# Altium PCB PCB_wordclocksmall_2023-02-03.pcbdoc (part 4 of 4)
Units mm, origin at the board's own origin, x right, y up, seen from the top; angles counter-clockwise.
Board outline 275.21 x 268.14 mm, 2 copper layers (Top Layer, Bottom Layer); 355 components, 229 nets, 1166 pads, 399 vias.
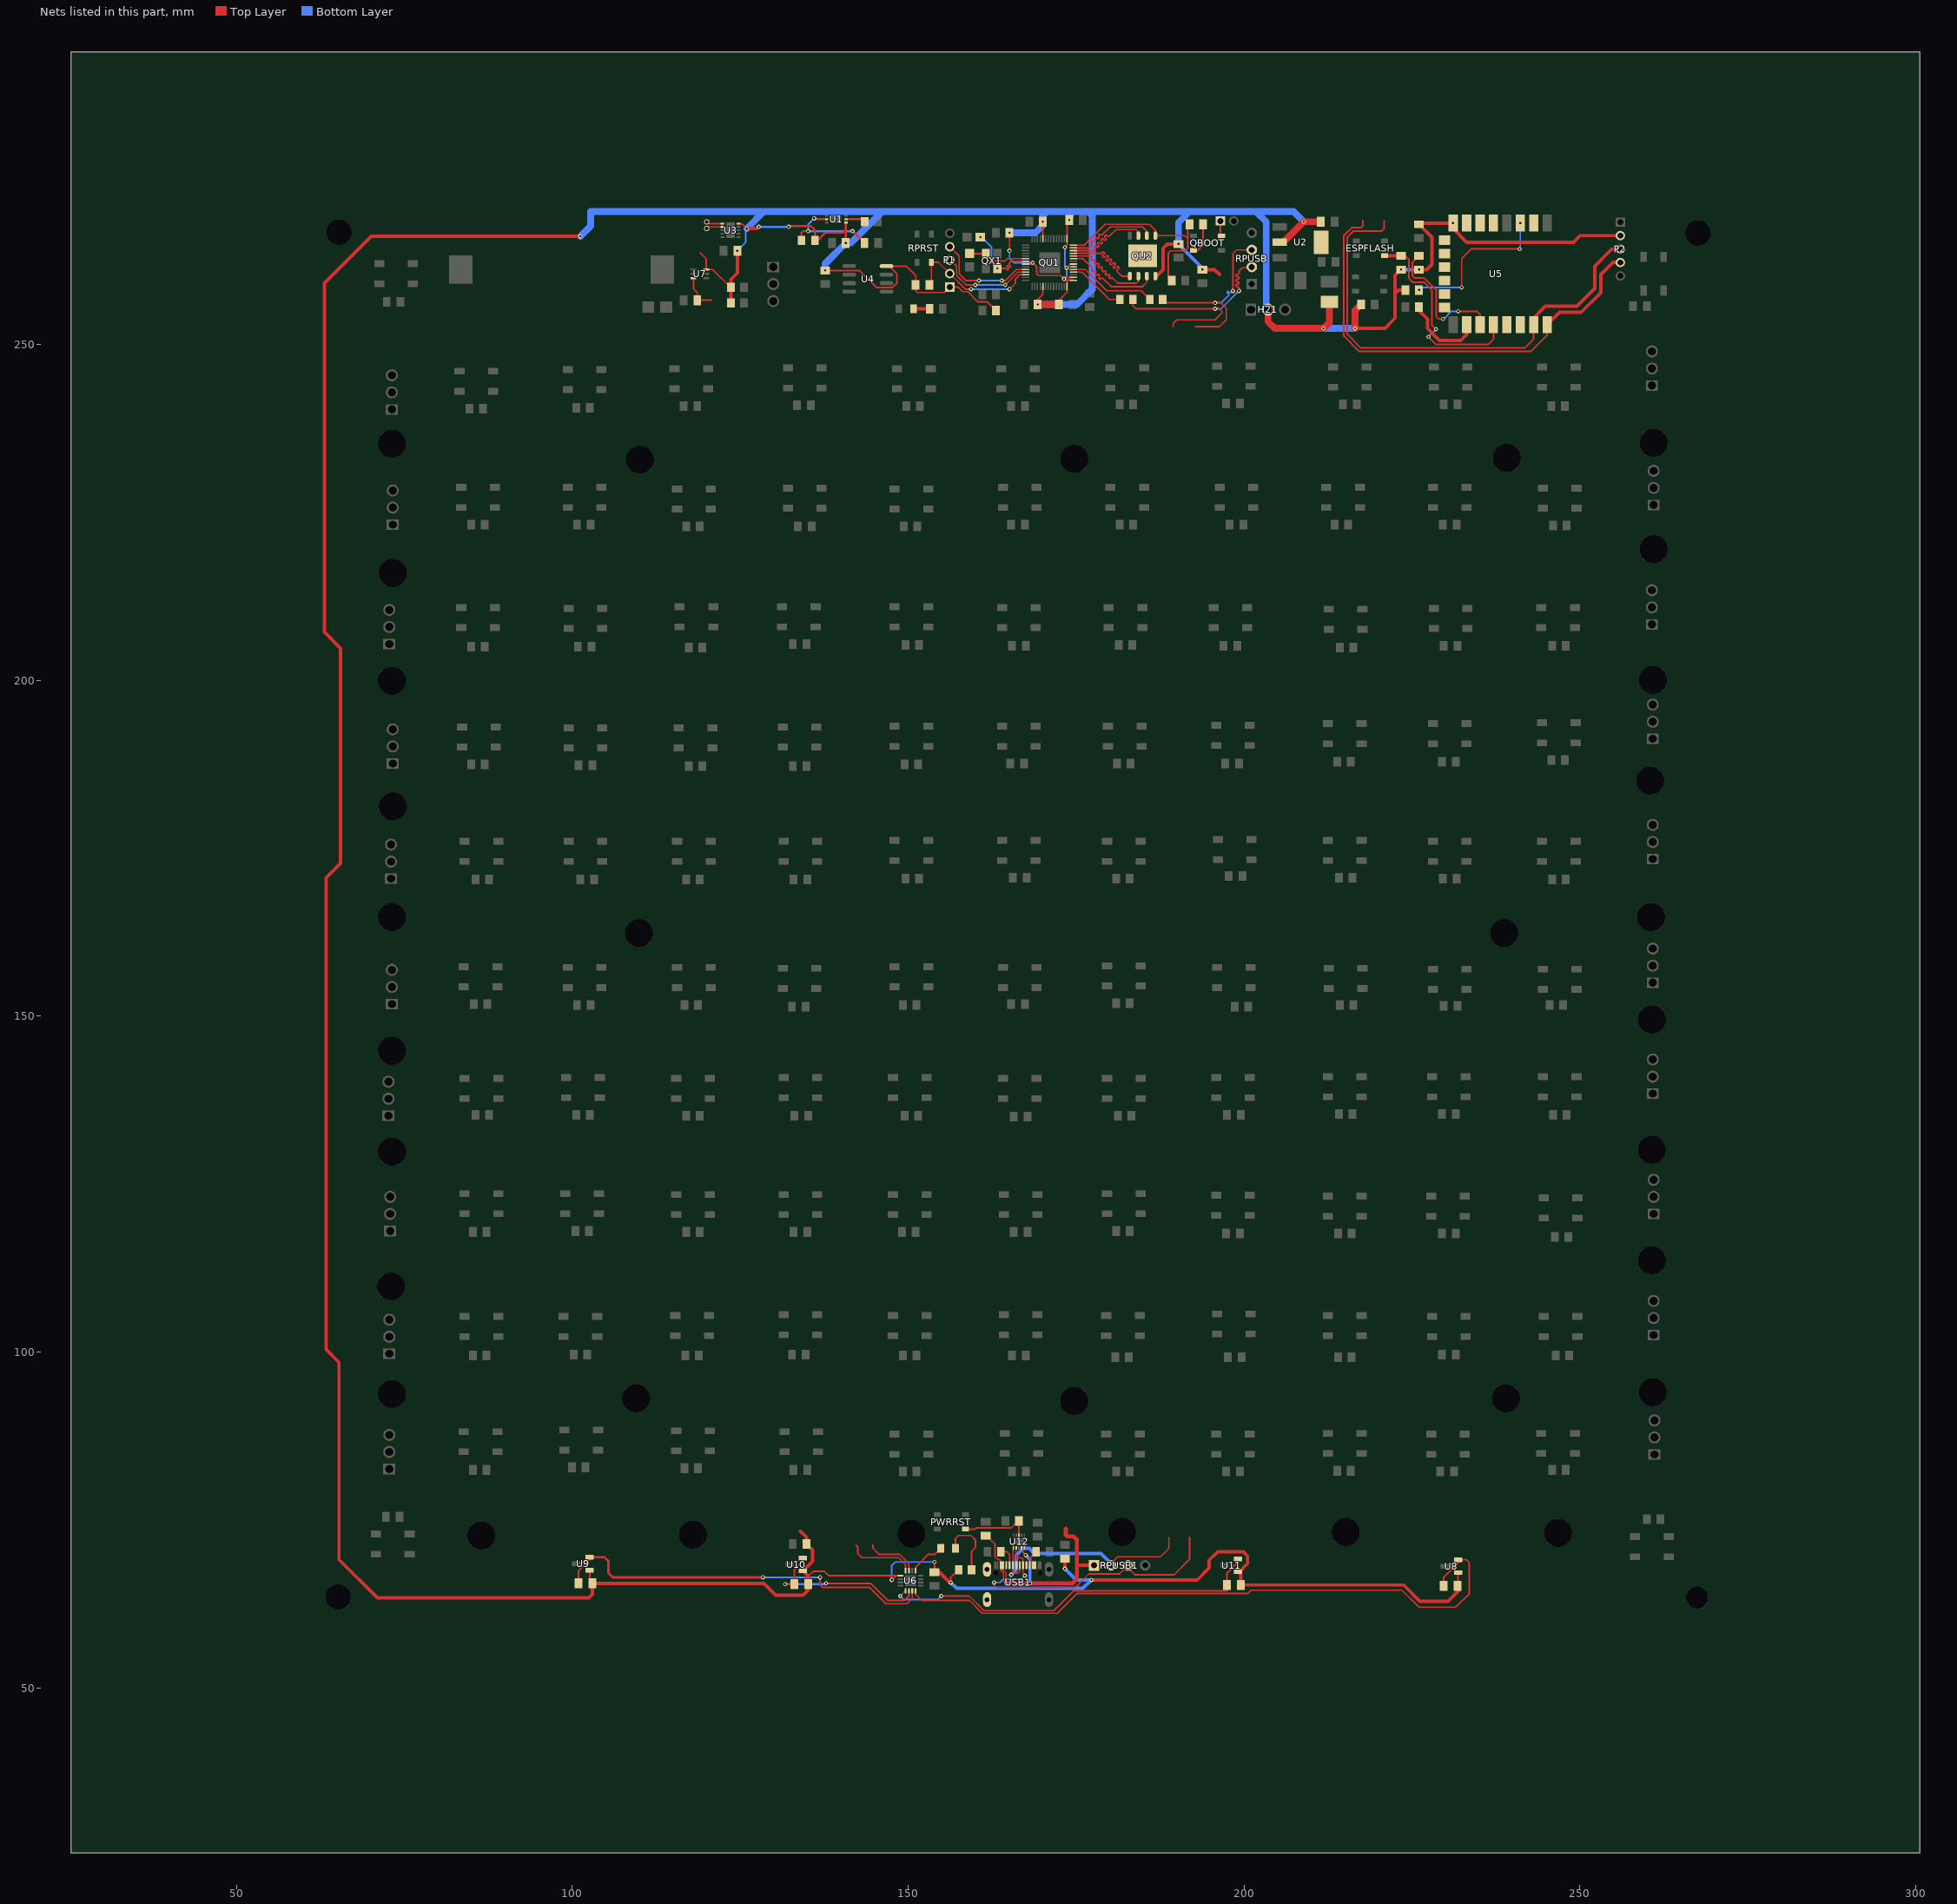
[diagram p4: the nets of this part, all layers, seen from the top]

## Via types
v1: diameter 0.635, hole 0.305, Top Layer to Bottom Layer, tented both sides, 361 vias
v2: diameter 0.61, hole 0.305, Top Layer to Bottom Layer, tented both sides, 37 vias
v3: diameter 1, hole 0.5, Top Layer to Bottom Layer, tented both sides, 1 vias

## Nets (pads, with @x,y where several pads share a name; then routed paths per layer and width w, separated by ;. In a path a pad name is that pad's centre, name@x,y a point inside that pad or via, vN(x,y) a via of type N, cw(c..) or ccw(c..) an arc to the next point about the centre after c; other vN are vias at no path point) (continued)
QBOOT_2: QBOOT.2 R11.2 | length 4.9
  Top Layer w0.254: QBOOT.2@192.464,264.019 193.109,264.02 193.929,264.84 R11.2@193.929,267.888
QBOOT_3: P3.1 QBOOT.3 | length 2.3
  Top Layer w0.229: P3.1@196.485,268.396 196.485,266.348 QBOOT.3@196.664,266.169
QSPI_CLK: QU1.52 QU2.6 | length 15
  Top Layer w0.229: QU1.52@174.62,263.174 177.18,263.174 177.312,263.042 177.312,262.861 177.223,262.772 177.223,262.592 177.312,262.503 177.493,262.503 177.582,262.592 177.762,262.592 177.851,262.503 177.851,262.323 177.762,262.234 177.762,262.054 177.851,261.965 178.031,261.965 178.12,262.054 178.3,262.054 178.389,261.965 178.389,261.784 178.3,261.695 178.3,261.515 178.389,261.426 178.57,261.426 178.659,261.515 178.839,261.515 178.928,261.426 178.928,261.246 178.839,261.157 178.839,260.977 178.928,260.888 179.108,260.888 179.197,260.977 179.377,260.977 179.466,260.888 179.466,260.707 179.377,260.616 179.377,260.438 179.466,260.347 179.647,260.347 179.738,260.438 179.916,260.438 180.007,260.347 180.007,260.169 179.916,260.077 179.916,259.9 180.007,259.808 180.185,259.808 180.276,259.9 180.454,259.9 181.229,259.125 184.023,259.125 184.277,259.379 QU2.6@184.277,260.176
QSPI_SD0: QU1.53 QU2.5 | length 14.7
  Top Layer w0.229: QU1.53@174.619,263.573 178.432,263.572 178.504,263.501 178.684,263.501 178.953,263.771 179.131,263.771 179.222,263.682 179.222,263.501 178.953,263.232 178.953,263.052 179.042,262.963 179.222,262.963 179.492,263.232 179.669,263.232 179.761,263.143 179.761,262.963 179.492,262.694 179.492,262.513 179.581,262.424 179.761,262.424 180.03,262.694 180.21,262.694 180.299,262.605 180.299,262.424 180.03,262.155 180.03,261.975 180.119,261.886 180.299,261.886 180.569,262.155 180.749,262.155 180.838,262.064 180.838,261.886 180.569,261.617 180.569,261.436 180.657,261.347 180.838,261.347 181.107,261.617 181.287,261.617 181.376,261.525 181.376,261.347 181.107,261.078 181.107,260.898 181.864,260.141 181.9,260.177 QU2.5@183.007,260.176
QSPI_SD1: QU1.55 QU2.2 | length 14.6
  Top Layer w0.229: QU1.55@174.619,264.373 176.952,264.373 177.371,264.792 177.371,264.969 177.279,265.061 177.279,265.239 177.371,265.33 177.549,265.33 177.64,265.239 177.818,265.239 177.909,265.33 177.909,265.508 177.818,265.599 177.818,265.78 177.909,265.869 178.087,265.869 178.178,265.78 178.356,265.78 178.448,265.869 178.448,266.049 178.356,266.138 178.356,266.318 178.448,266.407 178.628,266.407 178.717,266.318 178.897,266.318 180.086,267.507 184.912,267.507 185.547,266.872 QU2.2@185.547,266.202
QSPI_SD2: QU1.54 QU2.3 | length 14.5
  Top Layer w0.229: QU1.54@174.62,263.974 177.823,263.974 177.858,264.009 177.858,264.19 177.681,264.37 177.681,264.548 177.77,264.639 177.95,264.639 178.128,264.459 178.308,264.459 178.397,264.548 178.397,264.728 178.219,264.909 178.219,265.089 178.308,265.178 178.488,265.178 178.669,264.997 178.846,264.997 178.938,265.089 178.938,265.267 178.758,265.447 178.758,265.627 178.846,265.716 179.027,265.716 179.207,265.536 179.385,265.536 179.476,265.627 179.476,265.805 179.296,265.985 179.296,266.166 179.385,266.255 179.565,266.255 179.746,266.077 179.926,266.077 180.975,267.126 183.896,267.126 184.277,266.745 QU2.3@184.277,266.202
QSPI_SD3: QU1.51 QU2.7 | length 15.2
  Top Layer w0.229: QU1.51@174.619,262.773 176.058,262.772 177.424,261.406 177.424,261.226 177.335,261.137 177.335,260.956 177.424,260.867 177.604,260.867 177.693,260.956 177.874,260.956 177.963,260.867 177.963,260.687 177.874,260.598 177.874,260.418 177.963,260.329 178.143,260.329 178.232,260.418 178.412,260.418 178.501,260.329 178.501,260.149 178.412,260.06 178.412,259.879 178.501,259.79 178.681,259.79 178.77,259.879 178.951,259.879 180.213,258.617 184.912,258.617 185.547,259.252 QU2.7@185.547,260.176
QSPI_SS: QU1.56 QU2.1 R11.1 R12.2 | length 30.8
  Top Layer w0.229: QU1.56@174.62,264.774 176.21,264.774 179.324,267.888 185.928,267.888 186.817,266.999 QU2.1@186.817,266.202 ; QU2.1@186.817,266.202 191.17,266.202 191.643,265.729 ; R12.2@189.23,259.506 188.722,260.014 188.722,263.57 189.103,263.951 191.262,263.951 191.643,264.332 191.643,265.729 ; R11.1@191.897,267.888 191.643,267.634 191.643,265.729
QU1_46: QU1.46 R9.1 | length 8.6
  Top Layer w0.229: QU1.46@174.619,260.773 175.898,260.773 179.959,256.712 R9.1@181.533,256.712
QU1_47: QU1.47 R7.1 | length 13.2
  Top Layer w0.229: QU1.47@174.619,261.173 176.388,261.172 179.578,257.982 184.709,257.982 R7.1@185.978,256.712
QU2_9: QU2.9
R10_2: JP8.1 R10.2 U7.3 | length 5.7
  Top Layer w0.229: U7.3@118.054,259.872 118.054,258.292 118.618,257.728 R10.2@118.618,256.585
  Top Layer w0.254: R10.2@118.618,256.585 JP8.1@120.752,256.585
R13_2: LED116.2 R13.2 | length 2.4
  Top Layer w0.508: LED116.2@150.833,255.315 R13.2@153.212,255.315
R25_2: LED2.2 R25.2 | length 9.6
  Top Layer w0.229: LED2.2@157.056,70.784 157.056,72.265 157.48,72.689 159.385,72.689 160.02,72.054 160.02,70.911 159.462,70.353 R25.2@159.462,67.609
RUN: P1.2 QU1.26 R5.1 RPRST.2 | length 20.4
  Top Layer w0.229: R5.1@153.162,258.871 153.475,259.184 RPRST.2@153.475,262.232 154.532,262.232 P1.2@156.21,260.554 158.529,258.236 v1(159.385,258.236) ; v1(165.1,258.236) 165.989,259.125 165.989,259.76 166.602,260.373 QU1.26@167.519,260.373
  Bottom Layer w0.229: v1(159.385,258.236) v1(165.1,258.236)
S$28: 
S$38: 
S$40: 
SWCLK: P1.4 QU1.24 | length 15.6
  Top Layer w0.229: P1.4@156.21,264.554 157.607,263.156 157.607,260.522 158.623,259.506 v1(160.528,259.506) ; v1(163.957,259.506) 164.465,259.506 166.131,261.172 QU1.24@167.519,261.173
  Bottom Layer w0.229: v1(160.528,259.506) v1(163.957,259.506)
SWD: P1.3 QU1.25 | length 14.4
  Top Layer w0.229: P1.3@156.21,262.554 156.337,262.554 157.226,261.665 157.226,260.268 158.623,258.871 v1(160.02,258.871) ; v1(164.465,258.871) 166.368,260.773 QU1.25@167.519,260.773
  Bottom Layer w0.229: v1(160.02,258.871) v1(164.465,258.871)
U1_2: R1.1 U1.2 | length 3
  Top Layer w0.3: U1.2@140.747,268.65 143.179,268.65 R1.1@143.56,268.269
U1_5: C7.1 R2.1 U1.5 | length 15.6
  Top Layer w0.254: R2.1@134.128,265.475 134.128,266.634 134.366,266.872 v1(135.128,266.872)
  Top Layer w0.3: v1(136.017,268.777) 136.144,268.65 U1.5@137.891,268.65 ; v1(141.732,266.872) C7.1@143.51,265.094
  Bottom Layer w0.3: v1(136.017,268.777) 135.128,267.888 v1(135.128,266.872) v1(141.732,266.872)
U2_4: U2.4
U5_2: U5.2
U5_3: R8.1 U5.3 | length 23.9
  Top Layer w0.254: v2(232.41,258.49) 232.41,262.808 233.807,264.205 v2(241.046,264.205)
  Bottom Layer w0.254: v2(226.06,258.109) 226.441,258.49 v2(232.41,258.49) ; v2(241.046,264.205) 241.14,264.299 v2(241.14,268.073)
U5_5: U5.5
U5_6: U5.6
U5_7: U5.7
U5_10: R16.2 U5.10 | length 12.1
  Top Layer w0.508: R16.2@226.06,255.569 226.06,255.061 227.33,253.791 227.33,252.394 229.108,250.616 232.283,250.616 233.142,251.474 U5.10@233.141,252.972
U5_11: R15.2 U5.11 | length 20.6
  Top Layer w0.254: R15.2@226.06,263.189 225.044,262.173 225.044,260.268 225.425,259.887 226.822,259.887 228.6,258.109 228.6,254.172 228.981,253.791 v2(229.616,253.791) ; v2(231.902,254.934) 234.696,254.934 235.141,254.489 U5.11@235.141,252.97
  Bottom Layer w0.254: v2(229.616,253.791) 229.743,253.791 230.886,254.934 v2(231.902,254.934)
U5_12: ESPFLASH.4 R14.2 U5.12 | length 31.2
  Top Layer w0.254: R14.2@223.393,263.189 224.028,263.189 224.536,262.681 224.536,259.887 225.171,259.252 226.822,259.252 227.965,258.109 227.965,252.902 v2(228.6,252.267) ; v2(227.457,251.124) 228.6,249.981 236.347,249.981 237.14,250.774 U5.12@237.141,252.971
  Top Layer w0.508: ESPFLASH.4@220.921,263.257 220.989,263.189 R14.2@223.393,263.189
  Bottom Layer w0.254: v2(227.457,251.124) v2(228.6,252.267)
U5_13: U5.13
U5_14: U5.14
U5_15: JP11.1 P2.3 U5.15 | length 73
  Top Layer w0.254: JP11.1@220.878,268.396 220.878,267.278 220.472,266.872 216.281,266.872 215.392,265.983 215.392,251.505 217.424,249.473 241.808,249.473 243.141,250.806 U5.15@243.141,252.971
  Top Layer w0.508: U5.15@243.141,252.971 243.14,253.98 244.856,255.696 249.555,255.696 252.222,258.363 252.222,261.665 254.762,264.205 P2.3@256.032,264.205
U5_16: JP10.1 P2.4 U5.16 | length 69.2
  Top Layer w0.254: JP10.1@217.703,268.396 217.678,268.371 217.678,267.634 217.424,267.38 216.027,267.38 214.884,266.237 214.884,251.251 217.17,248.965 242.697,248.965 245.14,251.408 U5.16@245.141,252.971
  Top Layer w0.508: U5.16@245.141,252.971 246.977,254.807 250.19,254.807 253.111,257.728 253.111,260.395 254.922,262.206 P2.4@256.032,262.206
U5_17: U5.17
U5_18: U5.18
U5_19: U5.19
U5_20: U5.20
U5_21: U5.21
U5_22: U5.22
U6_13: LED2.1 U6.13 | length 5.4
  Top Layer w0.229: U6.13@151.117,67.458 151.118,67.978 153.035,69.895 153.967,69.895 LED2.1@154.856,70.784
U6_15: JP9.1 U6.15 | length 7.8
  Top Layer w0.229: JP9.1@144.78,71.267 144.78,70.784 145.669,69.895 148.717,69.895 150.119,68.493 U6.15@150.119,67.458
U6_16: JP2.1 U6.16 | length 10.1
  Top Layer w0.229: JP2.1@142.24,71.267 142.494,71.013 142.494,70.022 143.129,69.387 148.59,69.387 149.619,68.358 U6.16@149.619,67.458
U8_2: R18.1 U6.8 U8.2 | length 98.7
  Top Layer w0.229: U6.8@151.117,64.458 151.117,63.939 152.019,63.037 159.131,63.037 161.036,61.132 172.212,61.132 175.133,64.053 200.533,64.053 201.041,64.561 223.52,64.561 226.06,62.021 231.521,62.021 233.553,64.053 233.553,68.625 233.045,69.133 232.979,69.067 U8.2@231.886,69.067
  Top Layer w0.254: R18.1@229.743,65.196 229.743,66.466 231.886,68.609 U8.2@231.886,69.067
U9_2: R20.1 U6.7 U9.2 | length 58.7
  Top Layer w0.229: 146.558,62.656 146.558,62.529 149.86,62.529 150.617,63.286 U6.7@150.617,64.458
  Top Layer w0.254: R20.1@100.965,65.577 100.965,67.482 102.6,69.117 U9.2@102.6,69.448 ; v1(136.906,66.466) 136.906,65.323 137.287,64.942 144.272,64.942 146.558,62.656
  Top Layer w0.356: U9.2@102.6,69.448 104.841,69.448 105.41,68.879 105.41,67.101 106.045,66.466 122.047,66.466 v1(128.397,66.466)
  Bottom Layer w0.254: v1(128.397,66.466) v1(136.906,66.466)
U10_2: R21.1 U6.6 U10.2 | length 26.5
  Top Layer w0.254: R21.1@133.096,65.45 133.096,67.609 134.35,68.863 U10.2@134.35,69.321 ; v1@137.668,65.577 144.399,65.577 146.939,63.037 149.479,63.037 150.119,63.677 U6.6@150.119,64.458
  Top Layer w0.356: v1(131.699,65.45) R21.1@133.096,65.45
  Bottom Layer w0.356: v1(131.699,65.45) 137.668,65.45 v1(137.795,65.577)
U11_2: R22.1 U6.5 U11.2 | length 57.7
  Top Layer w0.229: v1(148.844,63.672) 149.619,64.447 U6.5@149.619,64.458 ; v1(154.94,63.672) 159.131,63.672 161.29,61.513 171.704,61.513 174.625,64.434 197.485,64.434 R22.1@197.485,65.323
  Top Layer w0.254: R22.1@197.485,65.323 197.485,67.101 199.12,68.736 U11.2@199.12,69.194
  Bottom Layer w0.229: v1(148.844,63.672) 149.352,63.164 154.432,63.164 v1(154.94,63.672)
U12_3: PWRRST.4 R23.2 U12.3 | length 10.6
  Top Layer w0.229: PWRRST.4@158.565,73.647 159.962,73.647 160.147,73.832 165.354,73.832 166.37,74.848 R23.2@166.497,74.848 U12.3@166.497,72.727
USB1_19: USB1.19
USB1_20: USB1.20
USB1_A5: R17.2 USB1.A5 | length 3.1
  Top Layer w0.229: R17.2@163.814,70.276 164.719,70.276 165.12,69.875 USB1.A5@165.12,68.257
USB1_A8: USB1.A8
USB1_A9: USB1.A9
USB1_B4: USB1.B4
USB1_B5: R19.2 USB1.B5 | length 2.4
  Top Layer w0.229: USB1.B5@168.12,68.257 168.12,69.343 R19.2@169.053,70.276
USB1_B8: USB1.B8
USB_D+: JP19.2 R7.2 RPUSB.3 | length 29.5
  Top Layer w0.229: R7.2@187.91,256.712 188.418,256.204 v1(195.707,256.204) 196.596,256.204 197.358,255.442 197.358,253.664 196.367,252.673 JP19.2@192.786,252.673 ; v1(198.374,257.982) 198.374,263.57 198.882,264.078 RPUSB.3@201.168,264.078
  Bottom Layer w0.229: v1(195.707,256.204) 196.596,256.204 197.754,257.362 197.754,257.482 197.515,257.72 197.515,257.84 197.574,257.901 197.693,257.901 197.935,257.662 198.054,257.662 v1(198.374,257.982)
USB_D+C: JP17.1 RPUSB1.3 U12.7 USB1.A6 USB1.B6 | length 47.4
  Top Layer w0.229: v1(162.814,65.704) 162.814,65.323 163.195,64.942 174.879,64.942 176.911,66.974 181.483,66.974 RPUSB1.3@182.753,68.244 182.753,67.863 183.769,66.847 189.611,66.847 191.897,69.133 JP17.1@191.897,72.41 ; U12.7@166.091,70.86 USB1.A6@166.116,68.244 ; 166.107,69.705 166.425,69.387 166.878,69.387 167.12,69.145 USB1.B6@167.12,68.257 167.12,66.986 v1(167.386,66.72)
  Bottom Layer w0.229: v1(162.814,65.704) 163.703,65.704 164.211,66.212 166.878,66.212 v1(167.386,66.72)
USB_D-: JP18.2 R9.2 RPUSB.2 | length 34.8
  Top Layer w0.229: R9.2@183.465,256.712 183.465,255.746 183.896,255.315 v1(195.707,255.315) 196.342,255.315 196.723,254.934 196.723,254.68 195.707,253.664 189.992,253.664 189.484,253.156 JP18.2@189.484,252.673 ; v1(199.263,257.982) 199.263,258.432 199.136,258.559 198.933,258.559 198.806,258.686 198.806,258.813 198.933,258.94 199.136,258.94 199.263,259.067 199.263,259.194 199.136,259.321 198.933,259.321 198.806,259.448 198.806,259.575 198.933,259.702 199.136,259.702 199.263,259.829 199.263,259.956 199.136,260.083 198.933,260.083 198.806,260.21 198.806,260.337 198.933,260.464 199.136,260.464 199.263,260.591 199.263,260.903 199.771,261.411 201.041,261.411 RPUSB.2@201.168,261.538
  Bottom Layer w0.229: v1(195.707,255.315) 196.596,255.315 v1(199.263,257.982)
USB_D-C: JP16.1 RPUSB1.2 U12.6 USB1.A7 USB1.B7 | length 36.7
  Top Layer w0.229: v1(165.354,66.847) 165.354,67.101 165.621,67.368 ; U12.6@165.697,70.872 165.62,70.795 USB1.B7@165.62,68.257 165.62,67.367 165.862,67.101 166.37,67.101 166.62,67.351 USB1.A7@166.62,68.257 ; RPUSB1.2@180.213,68.244 180.213,68.498 181.229,69.514 187.579,69.514 188.849,70.784 JP16.1@188.849,72.41
  Bottom Layer w0.508: v1(165.354,66.847) 166.116,67.609 166.116,69.768 167.132,70.784 168.021,70.784 168.783,70.022 178.689,70.022 180.213,68.498 RPUSB1.2@180.213,68.244
USB_VBUS: C137.1 JP5.2 RPUSB1.1 U12.9 U12.10 USB1.A4 USB1.B9 | length 40.3
  Top Layer w0.229: C137.1@161.544,72.689 161.671,72.689 162.941,71.419 162.941,69.514 163.322,69.133 163.576,69.133 163.81,68.899 USB1.A4@163.81,68.257 ; USB1.B9@164.13,68.257 USB1.A4@163.81,68.257 ; U12.9@166.897,70.872 167.105,70.872 167.105,70.176 v1(167.513,69.768) ; USB1.A4@163.81,68.257 163.81,67.502 164.211,67.101 164.211,65.958 v1(164.592,65.577) 164.592,67.101 163.81,67.883 USB1.A4@163.81,68.257
  Top Layer w0.254: U12.9@166.897,70.872 U12.10@167.297,70.872
  Top Layer w0.508: 175.133,68.244 RPUSB1.1@177.673,68.244
  Top Layer w0.635: v1(164.592,65.577) v1(168.148,65.577) 174.498,65.577 175.133,66.212 175.133,72.054 174.625,72.562 173.736,72.562 173.457,72.841 JP5.2@173.457,73.705
  Bottom Layer w0.508: v1(167.513,69.768) 168.148,69.133 v1(168.148,65.577)
VCC: C3.1 C4.1 C6.2 C9.1 C10.2 C125.2 C126.2 C127.2 C128.2 C129.1 C130.1 C131.2 C132.2 C133.2 C136.1 C139.2 H21.2 JP1.1 JP3.2 P1.1 P2.2 QU1.1 QU1.10 QU1.22 QU1.33 QU1.42 QU1.43 QU1.44 QU1.48 QU1.49 QU2.8 R2.2 R3.1 R4.1 R5.2 R6.2 R8.2 R14.1 R15.1 R18.2 R20.2 R21.2 R22.2 R24.2 R25.1 U1.1 U2.2 U3.10 U4.8 U5.8 U6.1 U7.6 U8.1 U9.1 U10.1 U11.1 | length 855.5
  Top Layer w0.229: JP1.1@119.024,263.697 119.944,262.777 U7.6@119.944,261.172 120.889,261.172 123.571,258.49 R3.1@123.621,258.49 ; U4.8@146.791,261.665 149.733,261.665 151.13,260.268 R5.2@151.13,258.871 151.13,257.982 151.384,257.728 155.384,257.728 P1.1@156.21,258.554 ; P1.1@156.21,258.554 157.416,258.553 158.115,257.855 158.877,257.855 160.401,256.331 161.798,256.331 C132.2@163.068,255.061 ; v1(156.337,65.704) 156.337,66.416 R25.1@157.53,67.609 ; v1(165.1,263.951) v1(165.1,266.618) ; QU1.22@167.519,261.973 168.329,261.973 v1(168.529,262.173) 169.164,261.538 169.164,260.522 169.418,260.268 172.72,260.268 v1(173.228,259.76) ; v1(169.291,255.95) 169.291,256.712 170.069,257.49 QU1.33@170.069,258.623 ; v1(170.053,268.269) 170.053,265.739 QU1.10@170.069,265.723 ; C133.2@172.466,255.95 172.466,256.585 173.669,257.788 QU1.42@173.669,258.623 173.669,259.319 v1(173.228,259.76) ; v1(173.355,264.459) 173.669,264.773 QU1.1@173.669,265.723 173.669,268.202 v1(173.99,268.523) ; v1(173.609,261.411) 174.171,261.973 QU1.49@174.619,261.973 QU1.48@174.619,261.573 ; 173.669,259.312 173.228,259.753 v1(173.228,259.76) ; QU1.43@174.619,259.573 173.415,259.573 v1(173.228,259.76) ; QU1.44@174.619,259.973 173.441,259.973 v1(173.228,259.76)
  Top Layer w0.254: U9.1@102.6,67.548 102.6,65.974 R20.2@102.997,65.577 ; U3.10@124.788,267.999 125.238,267.999 v2(125.984,267.253) ; R21.2@135.128,65.45 135.128,66.593 135.89,67.355 137.541,67.355 138.189,66.707 U6.1@148.868,66.707 ; v2(137.668,261.03) 139.446,261.03 142.748,261.03 145.288,258.49 147.701,258.49 148.336,259.125 148.336,260.522 147.193,261.665 U4.8@146.791,261.665 ; v1(147.574,66.085) 148.196,66.707 U6.1@148.868,66.707 ; C139.2@153.924,67.228 v1(153.924,68.752) ; R18.2@231.775,65.196 231.886,65.307 U8.1@231.886,67.167
  Top Layer w0.3: v1(132.207,267.507) 132.334,267.634 135.509,267.634 136.128,267.015 R2.2@136.128,265.475 ; R2.2@136.094,265.475 136.525,265.475 137.668,266.618 140.268,266.618 140.716,267.066 ; v1(140.716,265.094) 140.716,268.119 U1.1@140.747,268.15
  Top Layer w0.5: R4.1@123.62,256.204 123.62,258.49 123.62,259.683 124.587,260.649 v2(124.587,263.951)
  Top Layer w0.508: v1(101.219,266.11) 70.104,266.11 63.119,259.125 63.119,207.182 65.532,204.769 65.532,172.765 63.373,170.606 63.373,100.375 65.278,98.47 65.278,69.133 70.993,63.418 102.489,63.418 102.997,63.926 R20.2@102.997,65.577 128.524,65.577 130.302,63.799 134.366,63.799 135.128,64.561 R21.2@135.128,65.45 135.128,66.643 U10.1@134.35,67.421 135.763,68.834 135.763,70.53 C4.1@134.874,71.419 134.874,72.435 133.985,73.324 ; v2(125.984,267.253) 127.508,267.253 v1(127.762,267.507) ; C139.2@153.924,67.228 154.686,67.228 156.21,65.704 v1(156.337,65.704) ; v1(173.355,67.736) R24.2@173.355,69.26 ; v1(177.292,66.085) 193.04,66.085 194.818,67.863 194.818,69.006 196.088,70.276 199.898,70.276 200.533,69.641 200.533,68.498 199.329,67.294 U11.1@199.12,67.294 199.517,66.897 R22.2@199.517,65.323 223.774,65.323 226.187,62.91 230.378,62.91 231.902,64.434 ; QU2.8@186.817,260.176 186.979,260.176 187.96,261.157 187.96,264.332 188.595,264.967 v2(190.246,264.967) ; v2(193.802,261.157) 195.605,261.157 JP3.2@196.342,260.42 ; v2(216.535,252.394) 220.98,252.394 222.504,253.918 222.504,257.601 ; v2(223.393,261.157) 222.504,260.268 222.504,257.601 ; R8.2@224.028,258.109 223.012,258.109 222.504,257.601 ; v2(226.06,261.157) 227.203,261.157 227.965,261.919 227.965,265.983 C130.1@226.06,267.888 226.245,268.073 U5.8@231.141,268.073 231.14,267.253 233.172,265.221 249.047,265.221 250.03,266.204 P2.2@256.032,266.205
  Top Layer w1: v1(169.291,255.95) C133.2@172.466,255.95
  Top Layer w1.016: H21.2@203.581,255.188 203.581,253.41 204.597,252.394 v2(211.836,252.394) 212.725,253.283 C9.1@212.725,256.354 ; U2.2@205.308,265.208 205.854,265.208 v2(208.915,268.269) C10.2@211.455,268.269 ; v2(216.535,252.394) 216.535,255.061 R6.2@217.424,255.95
  Bottom Layer w0.229: v1(165.1,263.951) 165.1,262.808 165.735,262.173 v1(168.529,262.173) ; v1(173.228,259.76) 173.609,260.141 v1(173.609,261.411) 173.355,261.665 v1(173.355,264.459)
  Bottom Layer w0.254: v2(124.587,263.951) 125.857,265.221 125.857,267.126 v2(125.984,267.253) ; v1(147.574,66.085) 147.574,68.244 148.082,68.752 v1(153.924,68.752)
  Bottom Layer w0.3: v1(127.762,267.507) v1(132.207,267.507)
  Bottom Layer w0.508: v1(156.337,65.704) 157.226,64.815 176.022,64.815 v1(177.292,66.085) 175.006,66.085 v1(173.355,67.736) ; v2(190.246,264.967) 193.802,261.411 v2(193.802,261.157) ; v2(223.393,261.157) v2(226.06,261.157)
  Bottom Layer w1: v1(101.219,266.11) 102.743,267.634 102.743,269.793 128.524,269.793 ; v2(125.984,267.253) 128.524,269.793 ; v1(140.716,265.094) 141.478,265.094 146.177,269.793 ; v1(165.1,266.618) 168.91,266.618 170.053,267.761 v1(170.053,268.269) 170.053,269.158 170.688,269.793 ; v1(169.291,255.95) 175.133,255.95 177.419,258.236 177.419,269.158 176.784,269.793 174.625,269.793 173.99,269.158 v1(173.99,268.523) ; 175.26,269.793 170.688,269.793 ; 176.149,269.793 201.803,269.793 ; v2(190.246,264.967) 190.246,268.142 191.757,269.653 191.757,269.793 ; H21.2@203.581,255.188 203.327,255.442 203.327,268.269 201.803,269.793 ; v2(208.915,268.269) 207.391,269.793 201.803,269.793 ; 128.524,269.793 146.177,269.793 ; 146.177,269.793 170.688,269.793
  Bottom Layer w1.016: v2(137.668,261.03) 137.668,262.046 v1(140.716,265.094) ; v2(211.836,252.394) v2(216.535,252.394)
  other v2: 231.14,268.073
X1_1: U3.1 X1.1 | length 2.4
  Top Layer w0.254: X1.1@120.015,268.261 120.277,267.999 U3.1@122.354,267.999
X1_2: U3.2 X1.2 | length 2.4
  Top Layer w0.254: X1.2@120.015,267.261 120.253,267.499 U3.2@122.354,267.499
XIN: C134.1 QU1.20 QX1.1 | length 9.4
  Top Layer w0.229: QX1.1@161.583,263.527 161.582,262.897 162.052,262.427 164.465,262.427 164.846,262.772 QU1.20@167.519,262.773
  Top Layer w0.254: C134.1@159.131,263.554 159.158,263.527 QX1.1@161.583,263.527
XOUT: C135.2 QU1.21 QX1.3 | length 12.1
  Top Layer w0.229: v2(163.284,261.327) 164.526,261.327 164.765,261.111 164.884,261.111 164.945,261.172 164.945,261.292 164.704,261.53 164.704,261.65 164.765,261.711 164.884,261.711 165.123,261.472 165.242,261.472 165.303,261.53 165.303,261.65 165.064,261.891 165.064,262.137 165.301,262.374 QU1.21@167.518,262.374
  Bottom Layer w0.254: v2(160.766,265.983) 160.909,265.983 162.433,264.459 162.433,262.178 v2(163.284,261.327)
pads on no net: ESPFLASH.1 ESPRST.2 ESPRST.4 PWRRST.1 PWRRST.3 RPRST.1 RPRST.3 U1.7 U3.4 U3.8 U3.9 U3.11 U4.1 U4.2 U4.3 U4.7 U6.11 U6.12 U6.14 U12.5 USB1. USB1.17 USB1.18

## Polygon pours and split planes (outlines as drawn)
GND on Bottom Layer (solid): 38.1,280.842 44.069,44.876 287.909,47.289 283.21,275.889
GND on Top Layer (solid): 54.737,278.048 283.337,278.048 283.972,278.683 283.972,47.543 285.242,46.273 57.277,46.273 53.467,50.083

## Other copper
Top Layer:
  region net LED63_4: 195.25,154.746 196.752,153.748 197.67,154.939 196.82,155.504
  region net LED63_4: 216.889,157.619 218.387,157.619 218.138,158.073 217.138,158.073
  region net LED64_4: 211.887,154.619 213.389,153.621 214.307,154.812 213.457,155.377
  region net LED64_4: 232.383,157.492 233.881,157.492 233.672,157.843 232.672,157.843
  region net ESPRST_3: 238.441,269.323 239.61,269.323 238.611,270.047 238.072,269.867
  region net ESPRST_3: 239.776,266.823 238.506,266.823 238.887,266.745 239.395,266.745
  region net ESPRST_3: 245.776,266.823 244.506,266.823 244.887,266.775 245.395,266.775
  region net ESPRST_1: 220.396,265.057 220.396,265.757 220.277,265.661 220.277,265.153
  region net ESPRST_3: 245.84,268.708 245.84,267.438 246.602,267.819 246.602,268.327
  region net ESPRST_3: 256.646,259.869 256.289,260.856 256.833,260.793 257.024,260.265
  region net U5_15: 255.569,263.68 255.569,264.73 255.079,264.459 255.079,263.951
  region net U5_15: 242.747,254.222 243.841,254.222 244.503,254.984 243.784,254.984
  region net U5_16: 245.84,254.221 245.84,253.036 246.602,254.074 246.602,254.792
  region net U5_16: 255.569,261.68 255.569,262.73 255.079,262.459 255.079,261.951
  region net VCC: 255.569,265.68 255.569,266.73 255.079,266.459 255.079,265.951

## Silkscreen, mask and mechanical layers (free items; w line width, h text height)
Top Overlay:
  circle w0.508: c101.671,68.72 r5
  circle w0.508: c133.985,68.498 r5
  circle w0.508: c198.374,68.371 r5
  circle w0.508: c230.505,68.371 r5
  text "GND 3v3 RX TX RST" at 253.809,268.904 h0.64 r270
  text "FLASH" at 200.025,267.946 h0.9
  text "GND SWCLK SWD RUN 3V3" at 154.182,267.38 h0.5 r270
  text "GND SDA SCL" at 127.235,262.808 h0.8 r270
  text "GP16" at 134.054,259.125 h0.9 r90
  text "GND 3V3 5V" at 207.01,258.001 h0.8 r180
  text "5V D- D+ GND" at 204.031,257.855 h0.9 r90
  text "GP22" at 133.927,255.188 h0.9 r90
  text "GP25" at 135.636,254.103 h0.9
  text "5V DOUT GND" at 259.453,241.345 h1 r90
  text "5V DIN GND" at 76.446,238.551 h1 r90
  text "5V DIN GND" at 259.58,224.454 h1 r90
  text "5V DOUT GND" at 76.7,220.771 h1 r90
  text "5V DOUT GND" at 259.58,206.42 h1 r90
  text "5V DIN GND" at 76.446,203.88 h1 r90
  text "5V DIN GND" at 259.58,189.402 h1 r90
  text "5V DOUT GND" at 76.7,185.465 h1 r90
  text "5V DOUT GND" at 259.453,171.368 h1 r90
  text "5V DIN GND" at 76.192,169.082 h1 r90
  text "5V DIN GND" at 259.453,153.334 h1 r90
  text "5V DOUT GND" at 76.446,149.524 h1 r90
  text "5V DOUT GND" at 259.072,135.808 h1 r90
  text "5V DIN GND" at 76.065,133.522 h1 r90
  text "5V DIN GND" at 259.58,118.79 h1 r90
  text "5V DOUT GND" at 76.319,115.869 h1 r90
  text "5V DOUT GND" at 259.58,100.121 h1 r90
  text "5V DIN GND" at 76.065,97.962 h1 r90
  text "5V DIN GND" at 259.707,82.976 h1 r90
  text "5V DOUT GND" at 76.192,80.055 h1 r90
  text "VBUS  D-  D+   GND" at 176.53,65.64 h0.64
  text "Marcel Ochsendorf info@marcelochsendorf.com" at 84.201,61.142 h1.25
  text "JLCJLCJLCJLC" at 67.945,61.017 h1.5
  text "PCB V3" at 236.347,60.894 h2
  text "CLOCK WITH WORDS" at 201.676,60.624 h1.78
  text "01.02.2023" at 179.451,60.386 h2
Bottom Overlay:
  text "GND 3v3 RX TX RST" at 255.079,268.904 h0.64 r90
  text "GND SWCLK SWD RUN 3V3" at 155.19,267.253 h0.5 r90
  text "FLASH" at 199.39,265.914 h0.9
  text "GND SDA SCL" at 128.797,262.808 h0.8 r90
  text "5V D- D+ GND" at 201.734,258.236 h0.9 r270
  text "GND 3V3 5V" at 207.137,256.312 h0.8
  text "5V DIN GND" at 74.303,238.551 h1 r270
  text "5V DIN GND" at 257.818,224.454 h1 r270
  text "5V DIN GND" at 74.176,203.753 h1 r270
  text "5V DIN GND" at 257.818,189.402 h1 r270
  text "5V DIN GND" at 74.176,169.082 h1 r270
  text "5V DIN GND" at 257.691,153.461 h1 r270
  text "5V DIN GND" at 74.176,133.522 h1 r270
  text "5V DIN GND" at 257.691,118.917 h1 r270
  text "5V DIN GND" at 73.922,97.962 h1 r270
  text "5V DIN GND" at 257.691,82.976 h1 r270